# Altium PCB Speedometer_Tech.PcbDoc (part 2 of 4)
Units mm, origin at the board's own origin, x right, y up, seen from the top; angles counter-clockwise.
Board outline 309.2 x 103.7 mm, 4 copper layers (Top Layer, MidLayer1, MidLayer2, Bottom Layer), stack 0.603 mm thick; 246 components, 310 nets, 1253 pads, 701 vias.
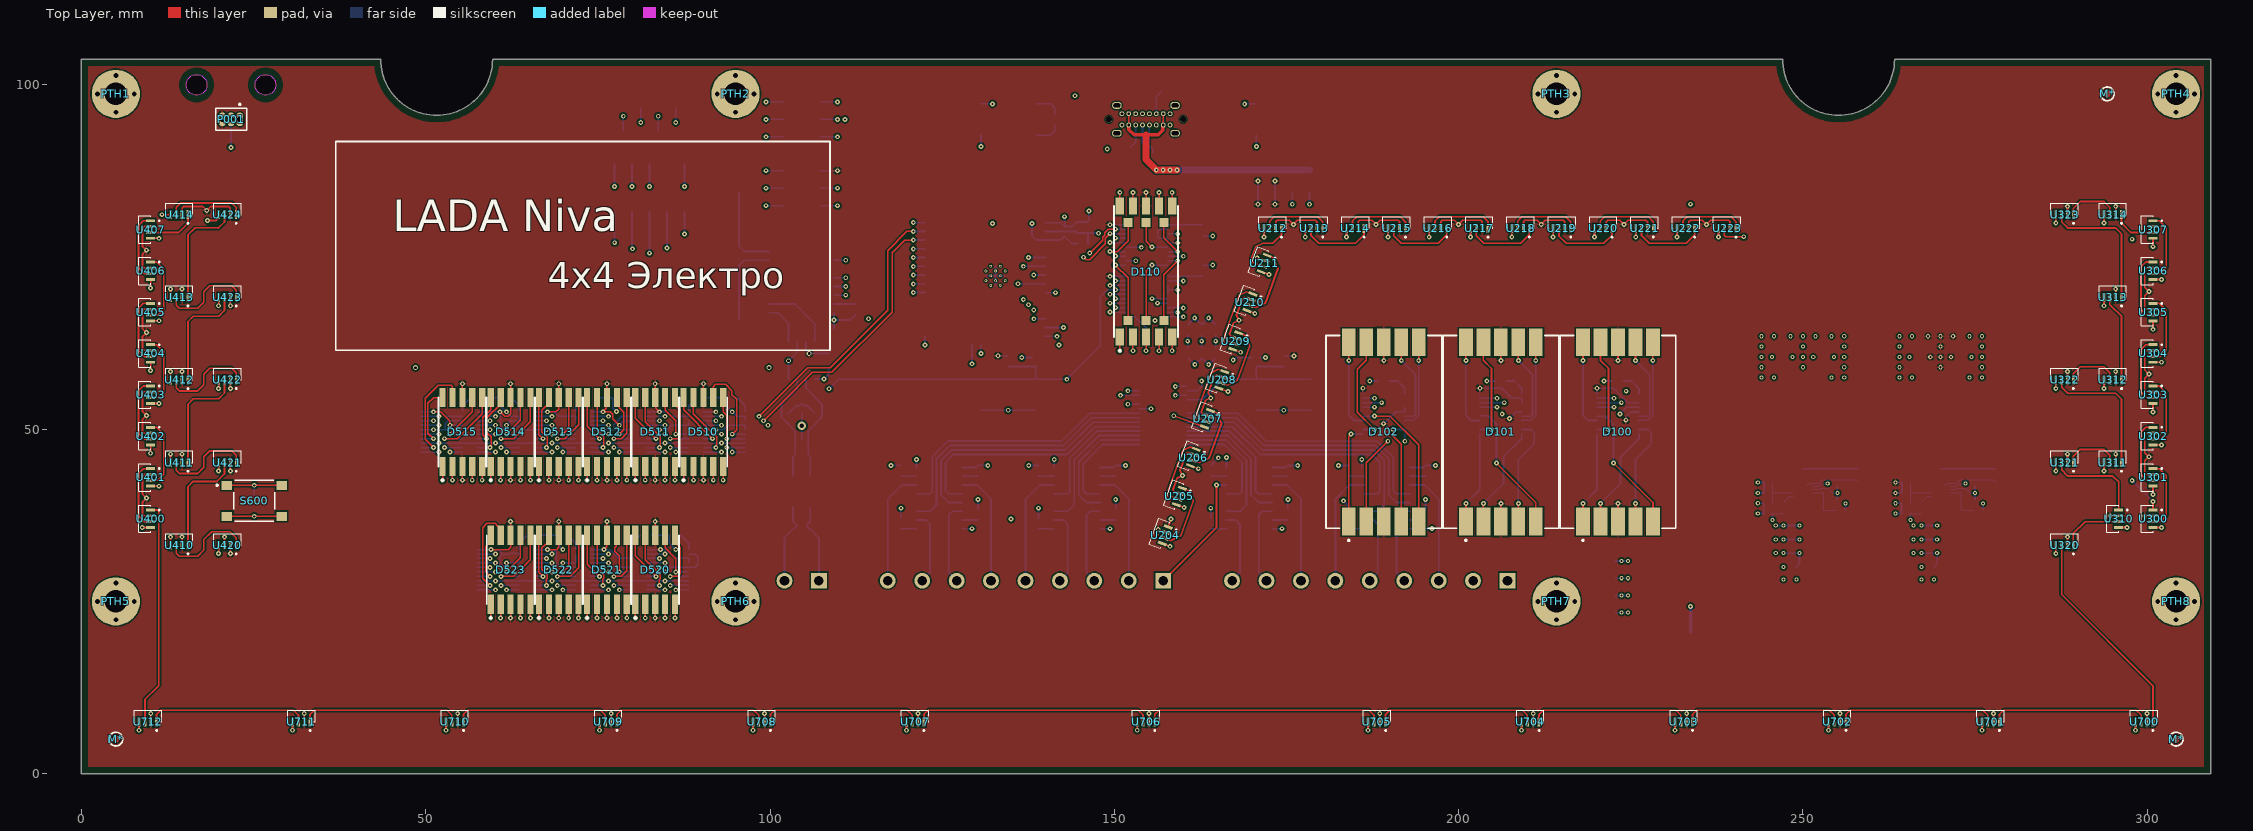
[diagram p0: Top Layer view]

## Part data (continued)
R000 R001 R002 R003 R004 R005 R006 R007 R840 R841 R842 R843 R844 R845: library part CMP-2100-03667-1, "Chip Resistor, 0 Ohm, +/- 5%, 0.1 W, -55 to 155 degC, 0603 (1608 Metric), RoHS, Tape and Reel", Case Code (Imperial)=0603, Case Code (Metric)=1608, Manufacturer=Yageo, Max Operating Temperature=155degC, Min Operating Temperature=-55degC, Package Description="2-Pin Surface Mount Device, Body 1.6 x 0.8 mm", Package Quantity=5000, Power Rating=100mW, Resistance=0mOhm, Temperature Coefficient=200ppm/degreesC, Tolerance=5%, Voltage Rating=50V, Case/Package=0603, Composition=ThickFilm, Contact Plating=Tin, Datasheet URL=http://www.yageo.com/NewPortal/yageodocoutput?fileName=/pdf/R-Chip/PYu-RC_Group_51_RoHS_L_5.pdf, Datasheet Version="Rev. 5, 10/2016", Depth=0.8mm, Height=0.45mm, Lead Free=LeadFree, Length=1.6mm, Manufacturer URL=http://www.yageo.com/, Military Standard=Not, Number of Pins=2, Package Reference=0603, Packaging=TapeandReel, Radiation Hardening=No, REACH SVHC=NoSVHC, RoHSCompliant=true, Termination=SMD/SMT, Voltage Rating (DC)=50V, Width=0.8mm
R100 R101 R102 R110 R111 R510 R511 R512 R513 R514 R515 R520 R521 R522 R523: library part CMP-2000-03530-2, "RES Thick Film, 680Ω, 5%, 0.1W, 200ppm/°C, 0603 / CRCW0603680RJNEA", Case Code (Imperial)=0603, Case Code (Metric)=1608, Max Operating Temperature=155°C, Max Power Dissipation=100mW, Min Operating Temperature=-55°C, Package Quantity=1, Resistance=680R, Temperature Coefficient=200ppm/°C, Tolerance=5%, Voltage Rating=75V, Case/Package=0603, Composition="Thick Film", Contact Plating=Tin, Depth=0.85mm, Features="Automotive AEC-Q200", Height=0.45mm, Lead Free="Lead Free", Length=1.55mm, Military Standard=Not, Number of Pins=2, Number of Terminations=2, Packaging="Tape and Reel", Power Rating=100mW, Radiation Hardening=No, Termination=SMD/SMT, Voltage Rating (DC)=75V, Weight=7.1E-05oz, Width=0.033inch, Working Voltage=75V
R600 R1100 R1103 R1104: library part CMP-1666-00003-5, "RES Thick Film, 1kΩ, 1%, 0.1W, 100ppm/°C, 0603, CRCW06031K00FKEA", Case Code (Imperial)=0603, Case Code (Metric)=1608, Max Operating Temperature=155°C, Max Power Dissipation=100mW, Min Operating Temperature=-55°C, Package Quantity=10, Resistance=1kR, Temperature Coefficient=100ppm/°C, Tolerance=1%, Voltage Rating=75V, Case/Package=0603, Composition="Thick Film", Contact Plating=Tin, Depth=0.85mm, Features="Automotive AEC-Q200", Height=0.45mm, Lead Free="Lead Free", Length=1.55mm, Military Standard=Not, Mount="Surface Mount", Number of Pins=2, Number of Terminations=2, Packaging="Tape and Reel", Power Rating=100mW, Radiation Hardening=No, Termination=SMD/SMT, Voltage Rating (DC)=75V, Weight=7.1E-05oz, Width=0.033inch
R800 R801 R802 R803 R810 R811 R812 R813 R820 R821 R822 R823 R830 R831 R832 R833: library part CMP-2000-04828-3, "RES 1kΩ 1.00% 0.1W 0603", Case Code (Imperial)=0603, Case Code (Metric)=1608, Max Operating Temperature=155°C, Max Power Dissipation=100mW, Min Operating Temperature=-55°C, Package Quantity=1, Ratings=AEC-Q200, Resistance=1kR, Resistor Type="Thick Film", Temperature Coefficient=100ppm/°C, Tolerance=1%, Voltage Rating=50V, Case/Package=0603, Construction=Rectangular, Depth=0.8mm, Features="Moisture Resistant", Height=0.022inch, Lead Free="Lead Free", Length=0.063inch, Military Standard=Not, Number of Terminations=2, Packaging="Tape and Reel", Power Rating=100mW, RoHS Compliant=Yes, Series=AC, Size Code=0603, Termination=SMD/SMT, Width=0.031inch
R900 R901 R903: library part CMP-1666-00019-3, "RES Thick Film, 4.7kΩ, 1%, 0.1W, 100ppm/°C, 0603", Case Code (Imperial)=0603, Case Code (Metric)=1608, Max Operating Temperature=155°C, Min Operating Temperature=-55°C, Package Quantity=5000, Power Rating=100mW, Resistance=4.7kR, Temperature Coefficient=100ppm/°C, Tolerance=1%, Voltage Rating=75V, Case/Package=0603, Composition="Thick Film", Contact Plating=Tin, Depth=0.85mm, Height=0.45mm, Lead Free="Lead Free", Length=1.55mm, Military Standard=Not, Mount="Surface Mount", Packaging="Tape and Reel", Termination=SMD/SMT, Voltage Rating (DC)=75V, Weight=7.1E-05oz, Width=0.85mm
R902: library part CMP-1666-00020-3, "RES Thick Film, 120Ω, 1%, 0.1W, 100ppm/°C, 0603", Case Code (Imperial)=0603, Case Code (Metric)=1608, Max Operating Temperature=155°C, Max Power Dissipation=100mW, Min Operating Temperature=-55°C, Package Quantity=10, Resistance=120R, Resistance Tolerance=1%, Resistor Type="Thick Film", Temperature Coefficient=100ppm/°C, Voltage Rating=75V, Case/Package=0603, Construction=Rectangular, Contact Plating=Tin, Depth=0.85mm, Features="Automotive AEC-Q200", Height=0.45mm, Lead Free="Lead Free", Length=1.55mm, Military Standard=Not, Mount="Surface Mount", Number of Terminations=2, Packaging="Tape and Reel", Power Rating=100mW, Radiation Hardening=No, RoHS Compliant=Yes, Series=CRCW, Technology="THICK FILM", Termination=SMD/SMT, Tolerance=1%, Voltage Rating (DC)=75V, Weight=7.1E-05oz, Width=0.033inch, Working Voltage=75V
R1001 R1002 R1005 R1021 R1022 R1025: library part CMP-2000-06932-2, "RES 20K OHM 1% 1/10W 0603 / RC0603FR-0720KL", Case Code (Imperial)=0603, Case Code (Metric)=1608, Max Operating Temperature=155°C, Max Power Dissipation=100mW, Min Operating Temperature=-55°C, Package Quantity=1, Resistance=20kR, Resistance Tolerance=1%, Resistor Type="Thick Film", Temperature Coefficient=100ppm/°C, Voltage Rating=50V, Case/Package=0603, Construction=Rectangular, Depth=0.8mm, Features="Moisture Resistant", Height=0.022inch, Lead Free="Lead Free", Length=0.063inch, Military Standard=Not, Number of Pins=2, Number of Terminations=2, Packaging="Tape and Reel", Power Rating=100mW, REACH SVHC="No SVHC", RoHS Compliant=Yes, Series=RC, Size Code=0603, Technology="THICK FILM", Termination=SMD/SMT, Tolerance=1%, Voltage Rating (DC)=50V, Width=0.031inch
R1003 R1023: library part CMP-2100-03662-2, "RES SMD 100K OHM 1% 1/10W 0603", Case Code (Imperial)=0603, Case Code (Metric)=1608, Max Operating Temperature=155°C, Max Power Dissipation=100mW, Min Operating Temperature=-55°C, Resistance=100kR, Resistance Tolerance=1%, Resistor Type="Thick Film", Temperature Coefficient=100ppm/°C, Voltage Rating=50V, Working Voltage=75V, Case/Package=0603, Construction=Rectangular, Depth=0.8mm, Features="Moisture Resistant", Height=0.45mm, Lead Free="Lead Free", Length=1.6mm, Military Standard=Not, Number of Pins=2, Number of Terminations=2, Packaging="Tape and Reel", Power Rating=100mW, REACH SVHC="No SVHC", RoHS Compliant=Yes, Series=RC, Technology="THICK FILM", Termination=SMD/SMT, Tolerance=1%, Voltage Rating (DC)=50V, Width=0.8mm
R1004: library part CMP-2000-03640-1, "CRCW060391K0FKEA", Manufacturer="Vishay Dale", Part Number=CRCW060391K0FKEA
R1024: library part CMP-1012-00754-2, "ERJ-3EKF1503V", Manufacturer=Panasonic, Part Number=ERJ-3EKF1503V
R1101 R1102: library part CMP-1012-00590-3, "RES Thick Film, 5.1kΩ, 1%, 0.1W, 100ppm/°C, 0603", Case Code (Imperial)=0603, Case Code (Metric)=1608, Max Operating Temperature=155°C, Min Operating Temperature=-55°C, Package Quantity=5000, Power Rating=100mW, Resistance=5.1kR, Temperature Coefficient=100ppm/°C, Tolerance=1%, Voltage Rating=75V, Case/Package=0603, Composition="Thick Film", Contact Plating=Tin, Depth=0.85mm, Height=0.45mm, Lead Free="Lead Free", Length=1.55mm, Military Standard=Not, Mount="Surface Mount", Packaging="Tape and Reel", Radiation Hardening=No, Termination=SMD/SMT, Voltage Rating (DC)=75V, Weight=7.1E-05oz, Width=0.85mm
S600 S1100 S1101 S1103 S1104: library part CMP-2000-05160-2, "SWITCH TACTILE SPST-NO 0.05A 12V / PTS645SM43SMTR92LFS", Case/Package=SMD/SMT, Color=Black, Contact Resistance=100mR, Current Rating=50mA, Max Operating Temperature=60°C, Max Voltage Rating (DC)=12V, Min Operating Temperature=-20°C, Operating Force=160gf, Package Quantity=1, Actuator Length=0.85mm, Actuator Material=Nylon, Actuator Type=Standard, Contact Material=Silver, Contact Plating=Silver, Depth=9mm, Illumination Type=Non-Illuminated, Lead Free="Lead Free", Length=6mm, Max Current Rating=50mA, Mechanical Life=100000Cycles, Mount="Surface Mount", Orientation=Straight, Packaging="Tape and Reel", REACH SVHC="No SVHC", Switch Function=Off-Mom, Termination="Gull Wing", Throw Configuration=SPST, Voltage Rating (DC)=12V
U100 U101 U102 U110 U111 U510 U511 U512 U513 U514 U515 U520 U521 U522 U523: library part CMP-0388-00397-2, "8-Bit Fast Mode Plus (FM+) I2C Bus Constant-Current LED Sink Driver, 3 to 5.5 V, -40 to 85 degC, 20-pin SOP (PW20), Green (RoHS & no Sb/Br)", Manufacturer="Texas Instruments", Code_JEDEC=MO-153, ComponentLink1Description="Manufacturer URL", ComponentLink1URL=http://www.ti.com/, ComponentLink2Description=Datasheet, ComponentLink2URL=http://www.ti.com/general/docs/lit/getliterature.tsp?genericPartNumber=TLC59108&fileType=pdf, ComponentLink3Description="Package Specification", ComponentLink3URL=http://www.ti.com.cn/cn/lit/ml/mpds362/mpds362.pdf, DatasheetVersion=SLDS156A, Eco-Plan="Green (RoHS & no Sb/Br)", Iout(Max)(A)=0.12, Mounting Technology="Surface Mount", PackageDescription="20-Pin Plastic Small Outline, Body 6.5 x 4.4 mm, 0.65 mm Pitch", PackageReference=PW0020A, PackageVersion=4040064-5/G, PartNumber=TLC59108IPWR, SubFamily="LED Driver", Vin(Max)(V)=5.5, Vin(Min)(V)=3
U204 U205 U206 U207 U208 U209 U210 U211 U212 U213 U214 U215 U216 U217 U218 U219 U220 U221 U222 U223 U300 U301 U302 U303 U304 U305 U306 U307 U310 U311 U312 U313 U314 U320 U321 U322 U323 U400 U401 U402 U403 U404 U405 U406 U407 U410 U411 U412 U413 U414 U420 U421 U422 U423 U424 U700 U701 U702 U703 U704 U705 U706 U707 U708 U709 U710 U711 U712: "12mA RGB SMD,2x4mm Light Emitting Diodes", Package=Package, Availability="Not in stock", Check_prices=https://www.snapeda.com/parts/WS2812B-4020/Worldsemi/view-part/?ref=eda, MF=Worldsemi, MP=WS2812B-4020, Price=None, SnapEDA_Link=https://www.snapeda.com/parts/WS2812B-4020/Worldsemi/view-part/?ref=snap
U800 U810 U820 U830: library part CMP-04899-000094-1, "IC TRNSLTR UNIDIRECTIONAL 16SO", Case/Package=SOP, High Level Output Current=-4mA, Low Level Output Current=4mA, Max Operating Temperature=125°C, Max Supply Voltage=18V, Min Operating Temperature=-40°C, Min Supply Voltage=3V, Package Quantity=2000, Quiescent Current=20uA, Channel Type=Unidirectional, Contact Plating=Gold, Data Rate=10Mbps, Lead Free="Lead Free", Logic Function="Level Shifter", Mount="Surface Mount", Number of Bits=4, Number of Channels=4, Number Of Circuits=4, Number of Pins=16, Output Type=Voltage, Packaging="Tape and Reel", Propagation Delay=240ns, Radiation Hardening=No, RoHS Compliant=Yes, Series=4000B, Technology=CMOS, Turn-On Delay Time=740ns
U840: library part CMP-0186-00176-2, "16-Bit I/O Expander with Serial Interface, 28-Pin SSOP, Extended Temperature", Code_JEDEC=MS-150, ComponentLink1Description="Manufacturer URL", ComponentLink1URL=http://www.microchip.com/, ComponentLink2Description=Datasheet, ComponentLink2URL=http://ww1.microchip.com/downloads/en/DeviceDoc/21952b.pdf, ComponentLink3Description="Package Specification", ComponentLink3URL=http://www.microchip.com/stellent/groups/techpub_sg/documents/packagingspec/en012702.pdf, DatasheetVersion="revB, Feb-2007", PackageDescription="28-Lead Plastic Shrink Small Outline (SS) - 5.3mm Body [SSOP]", PackageReference=SSOP-SS28, PackageVersion="revBB, Aug-2009", RevisionNote="URLs added."
U900: library part CMP-06279-000005-1, "IC TRANSCEIVER 1/1 8SOIC", Case/Package=SOIC, Max Operating Temperature=125°C, Max Supply Voltage=5.5V, Min Operating Temperature=-40°C, Min Supply Voltage=4.5V, Operating Supply Current=70mA, Package Quantity=3300, Data Rate=8Mbps, Mount="Surface Mount", Number of Pins=8, Number of Transceivers=1, Packaging="Tape and Reel", Receiver Hysteresis=200mV, Weight=0.019048oz
U901: library part CMP-0186-00133-3, "IC CAN CONTROLLER W/SPI 18SOIC", Ambient Temperature Range High=+125°C, Ambient Temperature Range Low=-65°C, Manufacturer=Microchip, Max Supply Voltage=5.5V, Min Supply Voltage=2.7V, Nominal Supply Current=10mA, Package=C04-051, Temperature="-40°C to +85°C", Temperature Range High=+85°C, Temperature Range Low=-40°C, Automotive=No, Category=IC, ComponentLink2Description=Datasheet, ComponentLink2URL=http://ww1.microchip.com/downloads/en/DeviceDoc/MCP2515-Stand-Alone-CAN-Controller-with-SPI-20001801J.pdf, Device Class L1="Integrated Circuits (ICs)", Device Class L2="Interface ICs", Device Class L3=Controllers, Digikey Description="IC CAN CONTROLLER W/SPI 18SOIC", Footprint Url=http://ww1.microchip.com/downloads/en/DeviceDoc/18L_SOIC_Wide_7.50_SO_C04-0051D.pdf, Function=Controller, Height=2.65mm, Interface=SPI,CAN, Ipc Land Pattern Name=SOIC127P1030X265-18, Lead Free=Yes, Manufacturer Part Number=MCP2515-I/SO, Mouser Description="CAN Interface IC W/ SPI Interface", Octopart=https://octopart.com/mcp2515-i%2Fso-microchip-430187, RoHS=TRUE, Standoff Height=0.1mm
U1000 U1020: library part TPS51386, "8A Synchronous Buck Converter - TPS51386"
U1100: library part CMP-017-000002-1, Design Item ID=ESP32WroomS3, Source=Schaltdose.SchLib
Y900: library part CMP-27762-000003-1, "CRYSTAL 16.0000MHZ 18PF SMD", Frequency=16MHz, Load Capacitance=18pF, Manufacturer=Abracon, Package=ABLS, Temperature="-40°C to +125°C", Temperature Range High=+125°C, Temperature Range Low=-40°C, Tolerance=30ppm, Automotive=No, Category=Crys, ComponentLink2Description=Datasheet, ComponentLink2URL=https://abracon.com/Resonators/abls.pdf, Device Class L1="Passive Components", Device Class L2="Crystals / Oscillators", Device Class L3=Crystals, Digikey Description="CRYSTAL 16.0000MHZ 18PF SMD", Esr=40Ω, Height=4.3mm, Lead Free=Yes, Manufacturer Part Number=ABLS-16.000MHZ-K4T, Mouser Description="Crystal 16MHz ±30ppm (Tol) ±50ppm (Stability) 18pF FUND 40Ohm 2-Pin HC-49/US SMD T/R", Octopart=https://octopart.com/abls-16.000mhz-k4t-abracon-18618626, RoHS=TRUE, Series=ABLS, Stability=50ppm, Standoff Height=0mm

## Via types
v1: diameter 0.7, hole 0.3, Top Layer to Bottom Layer, 568 vias
v2: diameter 0.6, hole 0.3, Top Layer to Bottom Layer, 96 vias
v3: diameter 1.27, hole 0.711, Top Layer to Bottom Layer, 33 vias
v4: diameter 0.7, hole 0.4, Top Layer to Bottom Layer, 4 vias